# Altium PCB Board_routed.PcbDoc (part 3 of 4)
Units mm, origin at the board's own origin, x right, y up, seen from the top; angles counter-clockwise.
Board outline 115.4 x 92.5 mm, 2 copper layers (Top Layer, Bottom Layer); 95 components, 82 nets, 440 pads, 192 vias.
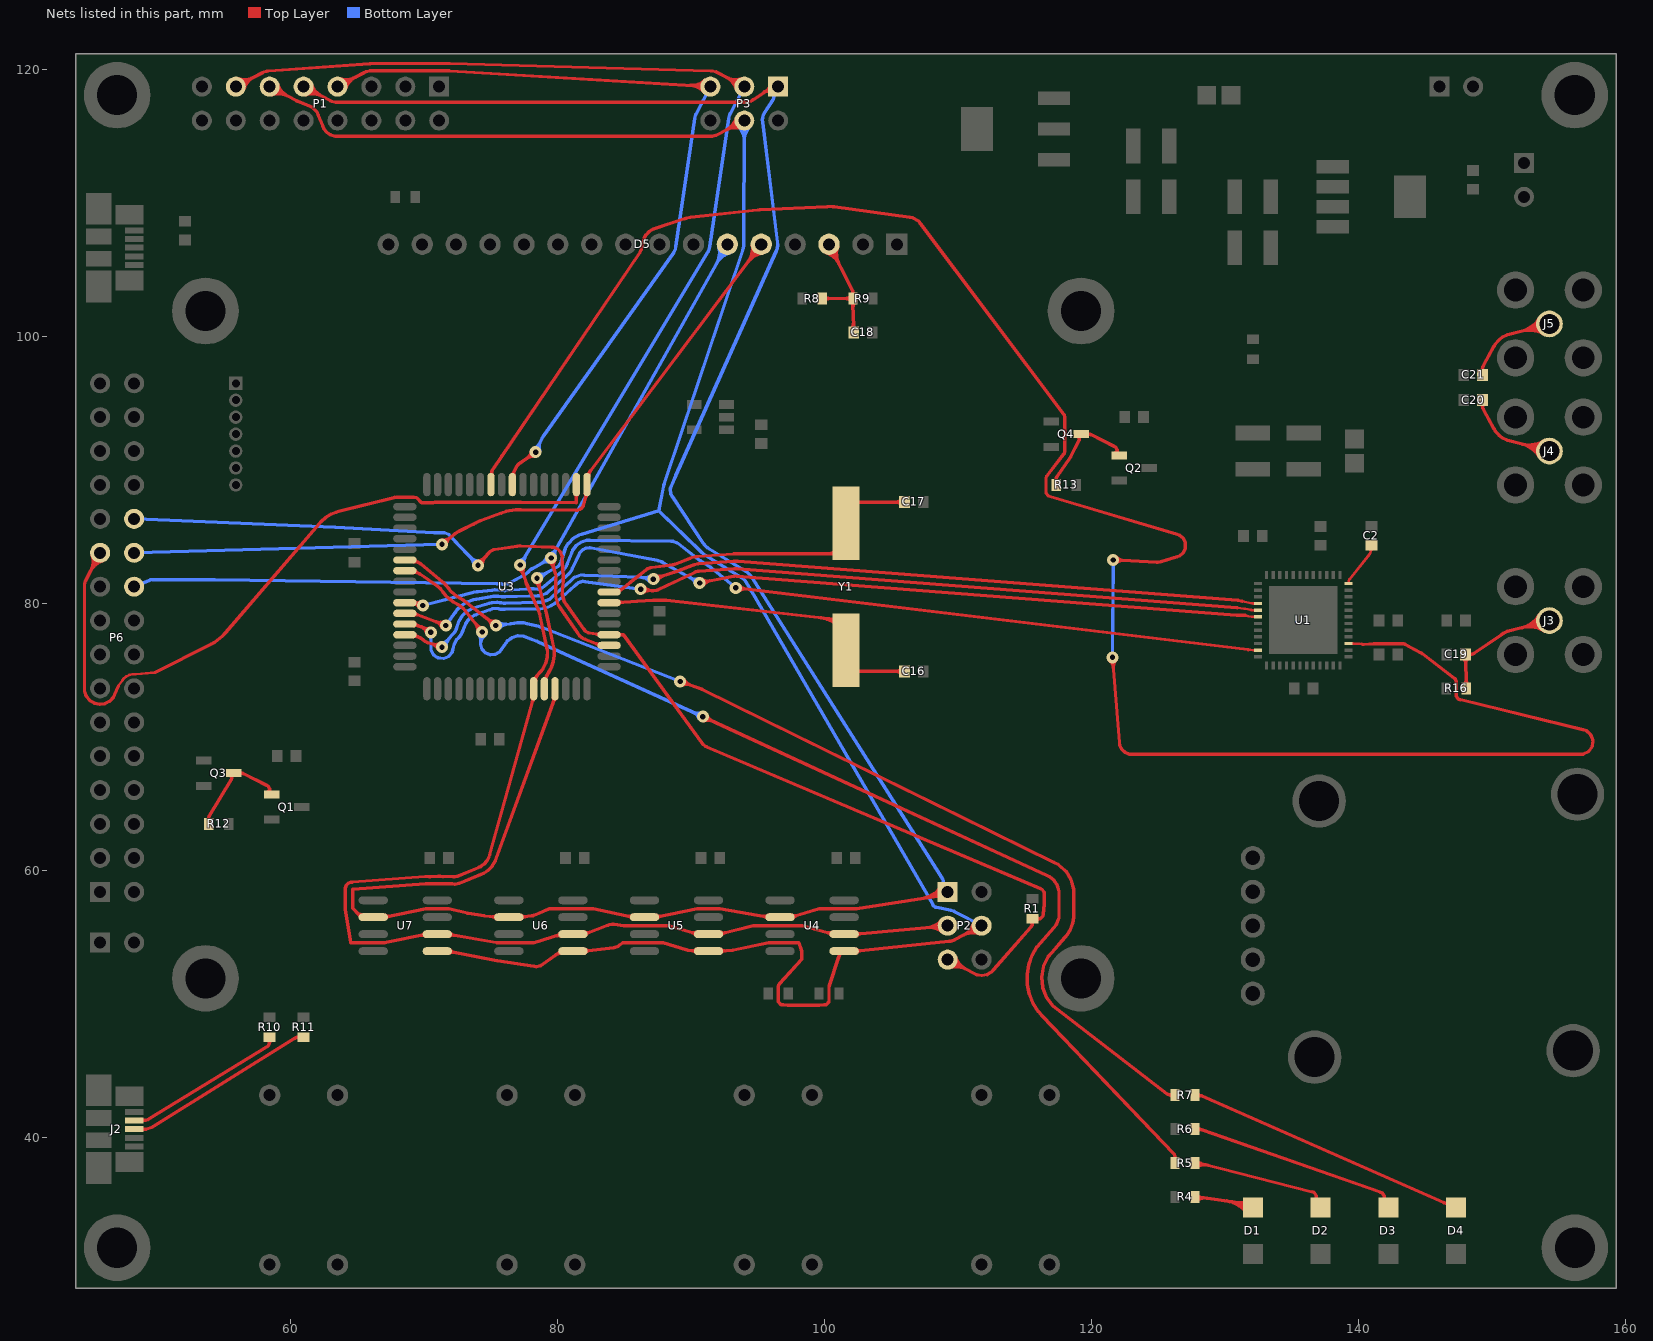
[diagram p3: the nets of this part, all layers, seen from the top]

## Via types
v1: diameter 0.9, hole 0.4, Top Layer to Bottom Layer, 183 vias
v2: diameter 0.8, hole 0.4, Top Layer to Bottom Layer, tented top, 9 vias

## Nets (pads, with @x,y where several pads share a name; then routed paths per layer and width w, separated by ;. In a path a pad name is that pad's centre, name@x,y a point inside that pad or via, vN(x,y) a via of type N, cw(c..) or ccw(c..) an arc to the next point about the centre after c; other vN are vias at no path point) (continued)
LED2: R5.2 U3.55 | length 88.7
  Top Layer w0.254: U3.55@68.55,82.48 69.023,82.48 69.15,82.48 69.184,82.48 69.25,82.464 69.279,82.448 69.611,82.271 69.637,82.257 69.688,82.226 69.712,82.209 70.93,81.359 71.037,81.284 71.229,81.103 71.312,80.999 71.446,80.83 71.655,80.567 72.173,80.133 72.469,79.975 72.476,79.971 72.636,79.885 72.915,79.654 73.028,79.513 v1(74.346,77.881) ; U3.55@69.193,82.338 cw(c69.329,81.891) 69.549,82.304 ; U3.55@69.292,82.523 ccw(c69.528,82.595) 69.412,82.377 ; v1@74.025,77.916 ccw(c73.249,77.998) 73.856,78.488 ccw(c74.463,78.978) v1@74.38,78.203 ; v1(90.88,71.54) 116.663,59.644 116.862,59.552 117.194,59.263 117.431,58.893 117.555,58.471 117.555,58.25 117.555,56.75 117.555,56.471 117.36,55.951 117.177,55.741 116.17,54.587 115.924,54.305 115.544,53.66 115.289,52.956 115.168,52.217 115.184,51.476 115.337,50.743 115.622,50.051 116.03,49.423 116.288,49.151 126.153,38.791 126.2,38.743 126.25,38.617 ; v1@90.991,71.237 cw(c91.261,70.505) 91.588,71.213 cw(c91.914,71.921) v1@91.183,71.652 ; R5.2@126.126,38.385 ccw(c125.971,38.617) 126.25,38.617 ; R5.2@126.25,38.1 126.25,38.423 126.25,38.55 126.25,38.617 ; R5.2@126.374,38.385 cw(c126.529,38.617) 126.25,38.617
  Bottom Layer w0.254: v1@74.095,77.677 cw(c73.571,77.25) 74.241,77.153 ; v1(74.346,77.881) 74.241,77.153 ; v1@74.528,77.615 ccw(c74.91,77.056) 74.241,77.153 ; v1@90.577,71.426 ccw(c89.847,71.152) 90.17,71.862 ccw(c90.492,72.572) v1@90.766,71.842 ; v1(90.88,71.54) 78.511,77.158 78.455,77.181 77.653,77.498 77.449,77.578 77.011,77.597 76.588,77.472 76.231,77.217 76.104,77.038 75.754,76.547 75.644,76.392 75.314,76.208 74.935,76.184 74.584,76.325 74.326,76.603 74.214,76.966 74.241,77.153
LED3: R7.2 U3.54 | length 82.8
  Top Layer w0.254: U3.54@68.55,83.28 69.023,83.28 69.15,83.28 69.184,83.28 69.25,83.264 69.279,83.248 69.611,83.071 69.654,83.048 69.735,82.994 69.774,82.962 71.36,81.656 71.456,81.577 71.632,81.398 71.709,81.299 71.827,81.149 72.006,80.921 72.453,80.546 72.708,80.41 72.794,80.364 72.96,80.256 73.039,80.194 v1(75.368,78.376) ; U3.54@69.193,83.138 cw(c69.329,82.691) 69.549,83.104 ; U3.54@69.292,83.323 ccw(c69.528,83.395) 69.412,83.177 ; v1@75.047,78.337 ccw(c74.273,78.242) 74.753,78.856 ccw(c75.233,79.471) v1@75.328,78.697 ; v1(89.177,74.182) 90.735,73.626 90.759,73.618 90.805,73.598 90.827,73.587 117.186,60.622 117.52,60.457 118.067,59.962 118.46,59.331 118.663,58.621 118.663,58.25 118.663,56.75 118.663,56.514 118.578,56.045 118.411,55.599 118.167,55.19 118.011,55.012 117.005,53.858 116.741,53.556 116.396,52.833 116.258,52.043 116.337,51.245 116.626,50.502 117.106,49.86 117.425,49.615 125.64,43.292 125.696,43.249 125.829,43.203 ; v1@89.316,73.89 cw(c89.65,73.185) 89.912,73.92 cw(c90.174,74.654) v1@89.469,74.32 ; R7.2@126.056,43.071 ccw(c125.83,42.944) 125.83,43.203 ; R7.2@126.077,43.321 cw(c125.83,43.522) 125.83,43.203 ; R7.2@126.25,43.18 126.027,43.203 125.9,43.203 125.829,43.203
  Bottom Layer w0.254: v1(75.368,78.376) 76.411,78.487 76.49,78.495 76.653,78.519 76.734,78.535 ; v1@75.571,78.628 ccw(c76.062,79.234) 76.143,78.458 ccw(c76.225,77.683) v1@75.619,78.173 ; 76.734,78.535 76.979,78.582 77.475,78.571 77.713,78.512 78.561,78.307 78.636,78.289 78.784,78.242 78.855,78.214 v1(89.177,74.182)
LMKCLK: U1.4 U3.61 | length 72.2
  Top Layer w0.2: 131.29,80.2 131.961,80.043 132.01,80.032 132.11,80.02 132.16,80.02 132.26,80.02 U1.4@132.46,80.02
  Top Layer w0.254: U3.61@68.55,77.68 69.023,77.68 69.15,77.68 69.182,77.68 69.243,77.666 69.272,77.652 69.689,77.446 69.763,77.409 69.9,77.316 69.962,77.261 70.026,77.204 70.173,77.119 70.253,77.094 v1(71.335,76.749) ; U3.61@69.197,77.54 cw(c69.343,77.109) 69.545,77.517 ; U3.61@69.29,77.727 ccw(c69.536,77.811) 69.421,77.578 ; v1@71.048,76.601 ccw(c70.355,76.243) 70.592,76.986 ccw(c70.829,77.729) v1@71.186,77.036 ; v1(87.17,81.85) 88.959,82.441 89.031,82.467 90.119,82.893 90.219,82.932 90.429,82.979 90.537,82.987 93.197,83.18 93.27,83.185 93.419,83.185 93.495,83.179 130.963,80.252 130.976,80.251 131,80.248 131.011,80.246 131.29,80.2 ; v1@87.315,82.139 ccw(c87.666,82.835) 87.91,82.095 ccw(c88.155,81.354) v1@87.459,81.705
  Bottom Layer w0.254: v1@71.303,77.071 ccw(c71.225,77.847) 71.829,77.353 ccw(c72.432,76.859) v1@71.656,76.781 ; v1(71.335,76.749) 72.07,77.648 72.099,77.683 72.161,77.752 72.195,77.786 72.199,77.789 72.267,77.857 72.368,78.019 72.398,78.109 72.53,78.497 72.603,78.715 72.853,79.107 73.188,79.427 73.587,79.658 73.81,79.723 74.885,80.035 75.071,80.09 75.458,80.113 75.649,80.081 75.656,80.08 75.759,80.063 75.961,80.049 76.064,80.051 78.49,80.106 78.807,80.113 79.401,80.343 79.642,80.553 80.986,81.726 81.054,81.787 81.064,81.797 81.254,81.977 81.743,82.16 82.003,82.149 86.246,81.976 86.267,81.975 86.312,81.971 86.333,81.968 v1(87.17,81.85) ; v1@86.912,81.656 ccw(c86.289,81.187) 86.398,81.959 ccw(c86.507,82.731) v1@86.976,82.108
LMKDATA: U1.5 U3.60 | length 73.9
  Top Layer w0.2: 130.92,79.7 131.452,79.631 131.525,79.619 131.894,79.546 131.96,79.533 132.094,79.52 132.16,79.52 132.26,79.52 U1.5@132.46,79.52
  Top Layer w0.254: U3.60@68.55,78.48 69.023,78.48 69.15,78.48 69.174,78.48 69.221,78.472 69.243,78.464 69.751,78.281 69.846,78.247 70.028,78.158 ; U3.60@69.213,78.346 cw(c69.389,77.973) 69.528,78.361 ; U3.60@69.284,78.543 ccw(c69.557,78.672) 69.455,78.388 ; 69.803,78.269 cw(c69.489,77.634) v1@70.181,77.787 ; 69.962,78.19 ccw(c70.211,78.696) v1@70.392,78.162 ; v1@70.173,77.865 ccw(c69.834,77.875) 69.984,78.18 ccw(c70.207,78.633) v1@70.384,78.159 ; v1@70.174,77.873 ccw(c69.855,77.889) 70.027,78.158 ; v1@70.348,78.143 cw(c70.2,78.428) 70.027,78.158 ; v1(70.496,77.856) 70.114,78.103 ; v1(86.21,81.1) 87.047,80.982 87.175,80.964 87.43,81.002 87.547,81.058 90.263,82.352 90.337,82.387 90.496,82.429 90.577,82.435 93.237,82.627 93.289,82.631 93.397,82.631 93.451,82.627 130.92,79.7 ; v1@86.404,80.842 cw(c86.873,80.219) 86.982,80.991 cw(c87.091,81.763) v1@86.468,81.294 ; 70.028,78.158 70.114,78.103 ; 70.114,78.103 ccw(c70.2,78.236) 70.298,78.111 cw(c70.2,78.236) 70.114,78.103 ; 70.114,78.103 cw(c70.028,77.969) 70.182,77.932 ccw(c70.028,77.969) 70.114,78.103
  Bottom Layer w0.254: v1(70.496,77.856) 70.506,76.742 70.507,76.537 70.703,76.175 71.045,75.946 71.453,75.903 71.835,76.057 72.101,76.372 72.145,76.572 72.189,76.774 72.23,76.961 72.413,77.296 72.549,77.43 72.552,77.434 72.646,77.528 72.794,77.75 72.844,77.872 73.063,78.406 73.118,78.541 73.284,78.784 73.497,78.986 73.747,79.14 73.884,79.188 74.949,79.564 75.099,79.617 75.416,79.645 75.573,79.619 75.58,79.618 75.695,79.599 75.927,79.581 76.042,79.583 78.473,79.608 78.68,79.611 79.089,79.689 79.474,79.838 79.827,80.052 79.984,80.191 81.32,81.377 81.386,81.437 81.396,81.447 81.529,81.573 81.877,81.685 82.058,81.66 v1(86.21,81.1)
LMKGOE: U1.11 U3.58 | length 71
  Top Layer w0.2: 131.73,76.57 132.114,76.523 132.125,76.521 132.148,76.52 132.16,76.52 132.26,76.52 U1.11@132.46,76.52
  Top Layer w0.254: U3.58@68.55,80.08 69.023,80.08 69.15,80.08 69.17,80.08 69.21,80.074 U3.58@69.229,80.068 ; U3.58@69.22,79.95 cw(c69.408,79.6) v1@69.522,79.98 ; U3.58@69.28,80.15 ccw(c69.56,80.301) v1@69.469,79.996 ; U3.58@69.353,79.985 ccw(c69.366,80.426) v1@69.669,80.105 ; U3.58@69.377,80.053 ccw(c69.493,80.24) v1@69.654,80.09 ; U3.58@69.401,80.039 cw(c69.195,79.706) v1@69.576,79.796 ; v1@69.593,79.743 ccw(c69.064,79.517) U3.58@69.229,80.068 ; v1@69.712,80.139 cw(c69.395,80.62) U3.58@69.229,80.068 ; v1(69.89,79.87) U3.58@69.229,80.068 ; v1(93.34,81.2) 131.73,76.57 ; v1@93.539,80.946 cw(c94.021,80.332) 94.114,81.107 cw(c94.208,81.881) v1@93.594,81.399
  Bottom Layer w0.254: v1(69.89,79.87) 71.564,80.309 71.565,80.31 73.579,80.833 73.69,80.862 73.915,80.903 74.026,80.914 75.089,81.026 75.269,81.045 75.627,81.034 75.802,81.005 75.809,81.004 75.883,80.992 76.03,80.985 76.105,80.991 77.658,81.103 77.834,81.116 78.195,81.117 78.37,81.105 78.392,81.103 78.551,81.092 78.856,81.191 78.978,81.295 80.335,82.439 80.456,82.541 80.643,82.8 80.701,82.948 81.059,83.847 81.14,84.049 81.412,84.386 81.772,84.627 82.189,84.751 82.405,84.748 88.52,84.677 88.664,84.675 88.936,84.58 89.049,84.491 90.529,83.338 90.577,83.3 90.679,83.228 90.733,83.194 91.405,82.77 91.442,82.746 91.513,82.695 91.546,82.668 v1(93.34,81.2)
LMKLE: U1.6 U3.59 | length 71.5
  Top Layer w0.2: 131.52,79.13 131.612,79.102 131.747,79.061 132.022,79.02 132.16,79.02 132.26,79.02 U1.6@132.46,79.02
  Top Layer w0.254: U3.59@68.55,79.28 69.023,79.28 69.15,79.28 69.175,79.28 69.223,79.271 69.247,79.263 v1(71.618,78.374) ; U3.59@69.211,79.145 cw(c69.384,78.766) 69.53,79.156 ; U3.59@69.285,79.341 ccw(c69.556,79.464) 69.451,79.186 ; v1@71.324,78.24 ccw(c70.614,77.917) 70.888,78.647 ccw(c71.161,79.378) v1@71.484,78.668 ; v1(90.64,81.56) 93.17,82.06 93.229,82.072 93.349,82.079 93.408,82.074 130.877,79.148 130.908,79.146 131.32,79.137 131.328,79.137 131.52,79.13 ; v1@90.82,81.828 ccw(c91.254,82.476) 91.405,81.711 ccw(c91.556,80.946) v1@90.908,81.38
  Bottom Layer w0.254: v1(71.618,78.374) 72.31,79.34 72.45,79.536 72.804,79.87 73.216,80.129 73.669,80.305 73.907,80.347 74.983,80.539 75.167,80.571 75.54,80.574 75.725,80.543 75.733,80.542 75.819,80.528 75.991,80.517 76.076,80.52 77.86,80.584 77.881,80.585 78.49,80.604 78.715,80.611 79.135,80.774 79.307,80.921 80.657,82.08 80.799,82.201 81.023,82.494 81.102,82.66 81.597,83.696 81.66,83.826 81.863,84.034 82.121,84.165 82.409,84.206 82.552,84.179 87.436,83.256 87.547,83.235 87.764,83.157 87.865,83.101 v1(90.64,81.56) ; v1@90.329,81.471 ccw(c89.58,81.257) 89.958,81.939 ccw(c90.337,82.62) v1@90.551,81.871
LMKSYNC: U1.27 U3.42 | length 159.3
  Top Layer w0.2: U1.27@139.26,77.02 139.46,77.02 139.56,77.02 139.562,77.02 140.025,77.013 140.098,77.012 140.239,76.981 140.306,76.952 140.31,76.95
  Top Layer w0.254: U3.42@75,88.93 75,89.403 75,89.53 75,89.689 75.093,89.995 75.182,90.128 75.815,91.073 75.821,91.082 86.105,106.245 86.163,106.331 86.249,106.518 86.275,106.617 86.445,107.251 86.484,107.398 86.633,107.665 86.841,107.886 87.098,108.05 87.244,108.099 89.532,108.858 89.632,108.891 89.843,108.937 89.949,108.949 94.968,109.5 95.125,109.512 100.193,109.758 100.325,109.764 100.586,109.752 100.718,109.734 106.378,108.949 106.621,108.916 107.044,108.667 107.191,108.471 117.901,94.216 117.943,94.161 117.987,94.029 117.987,93.96 117.987,91.46 117.987,91.389 117.941,91.255 117.898,91.199 116.672,89.611 116.629,89.555 116.583,89.421 116.583,89.35 116.583,88.45 116.583,88.309 116.752,88.082 116.888,88.041 126.4,85.202 126.582,85.147 126.868,84.898 127.026,84.554 127.027,84.173 126.871,83.827 126.586,83.577 126.404,83.522 125.174,83.149 125.1,83.126 124.95,83.108 124.873,83.112 v1(121.612,83.285) ; 75.073,89.929 ccw(c75.423,89.822) U3.42@75.122,89.614 ; v1@121.359,75.745 cw(c120.854,75.15) 121.632,75.214 cw(c122.409,75.277) v1@121.814,75.782 ; v1(121.568,75.991) 122.092,69.581 122.106,69.406 122.259,69.093 122.515,68.857 122.841,68.729 123.016,68.729 156.616,68.729 156.843,68.729 157.248,68.941 157.508,69.317 157.563,69.771 157.401,70.198 157.059,70.501 156.837,70.556 147.625,72.822 147.49,72.855 147.32,73.072 147.32,73.21 147.32,74.11 147.32,74.203 147.237,74.371 147.164,74.427 144.788,76.251 144.76,76.272 144.7,76.31 144.67,76.327 143.504,76.955 143.466,76.976 143.383,76.997 143.34,76.997 141.14,76.997 141.118,76.996 140.385,76.95 140.366,76.948 140.328,76.949 140.31,76.95 ; v1@121.828,83.045 cw(c122.35,82.465) 122.391,83.244 cw(c122.432,84.023) v1@121.853,83.501
  Bottom Layer w0.254: v1(121.568,75.991) v1(121.612,83.285)
MISO: P1.9 P2.1 P3.1 U3.13 U4.2 U5.2 U6.2 U7.2 | length 200.4
  Top Layer w0.234: 79.371,57.148 82.669,57.154
  Top Layer w0.254: P1.9@60.96,118.745 62.955,117.702 63.081,117.636 63.358,117.568 63.5,117.568 93.98,117.568 94.152,117.568 94.479,117.665 94.621,117.758 95.537,118.353 95.589,118.387 95.708,118.422 95.77,118.422 95.897,118.422 P3.1@96.52,118.745 ; P1.9@61.07,118.393 cw(c61.337,117.543) 61.749,118.332 cw(c62.162,119.122) P1.9@61.312,118.855 ; P1.9@61.146,118.15 cw(c61.596,116.715) 62.293,118.048 cw(c62.99,119.381) P1.9@61.555,118.931 ; 64.866,56.942 ccw(c65.435,57.448) U7.2@65.39,56.688 ; U7.2@67.076,56.659 ccw(c67.318,57.024) 67.405,56.595 ; U7.2@67.124,56.419 cw(c67.455,56.2) 67.377,56.589 ; 70.208,57.15 71.752,57.15 ; 70.208,57.151 70.201,57.151 70.187,57.15 70.18,57.15 70.163,57.15 70.13,57.147 70.113,57.143 67.04,56.521 67.025,56.518 66.995,56.515 66.98,56.515 66.853,56.515 U7.2@66.18,56.515 65.507,56.515 65.38,56.515 65.316,56.515 65.199,56.567 65.156,56.616 64.641,57.195 64.643,58.248 64.641,58.598 70.106,59.029 70.137,59.031 70.198,59.032 70.229,59.03 70.343,59.024 70.374,59.023 70.433,59.022 70.462,59.023 70.703,59.03 70.738,59.03 70.807,59.03 70.861,59.03 71.094,59.037 71.158,59.036 71.268,59.032 71.299,59.03 71.312,59.029 71.343,59.027 71.407,59.025 71.439,59.025 71.768,59.03 71.787,59.03 71.825,59.029 71.843,59.028 72.12,59.009 72.294,58.998 72.634,59.054 72.795,59.12 74.275,59.733 74.465,59.811 74.807,60.045 75.091,60.341 75.31,60.692 75.38,60.886 79.783,72.936 79.792,72.958 79.8,73.006 79.8,73.03 79.8,73.157 U3.13@79.8,73.63 ; 71.752,57.151 71.758,57.151 71.77,57.15 71.776,57.15 71.784,57.15 71.802,57.15 71.838,57.145 71.855,57.141 73.223,56.825 73.279,56.814 74.505,56.615 74.54,56.61 75.511,56.516 75.519,56.516 75.533,56.515 75.54,56.515 75.667,56.515 U6.2@76.34,56.515 77.013,56.515 77.14,56.515 77.148,56.515 77.165,56.516 77.173,56.517 78.059,56.615 78.099,56.619 78.177,56.64 78.215,56.656 79.371,57.148 ; 75.121,56.554 ccw(c75.161,56.975) U6.2@75.43,56.649 ; 75.127,56.553 cw(c75.088,56.142) U6.2@75.406,56.405 ; U6.2@77.248,56.65 ccw(c77.513,56.981) 77.56,56.56 ; U6.2@77.275,56.407 cw(c77.596,56.15) 77.551,56.559 ; U3.13@79.666,72.968 cw(c79.29,72.793) 79.679,72.651 ; 79.707,72.727 cw(c79.989,72.624) U3.13@79.862,72.896 ; 82.669,57.154 85.637,56.522 85.653,56.518 85.684,56.515 85.7,56.515 85.827,56.515 U5.2@86.5,56.515 87.173,56.515 87.3,56.515 87.315,56.515 87.345,56.518 87.36,56.521 90.433,57.143 90.45,57.147 90.483,57.15 90.5,57.15 90.507,57.15 90.521,57.151 ; 85.275,56.599 ccw(c85.366,57.029) U5.2@85.606,56.66 ; 85.306,56.592 cw(c85.223,56.206) U5.2@85.555,56.421 ; U5.2@87.396,56.659 ccw(c87.638,57.024) 87.725,56.595 ; U5.2@87.444,56.419 cw(c87.775,56.2) 87.697,56.589 ; 90.528,57.151 90.521,57.151 ; 95.437,56.583 ccw(c95.51,57.009) U4.2@95.76,56.656 ; 95.458,56.58 cw(c95.39,56.182) U4.2@95.719,56.415 ; P3.1@95.793,118.422 cw(c95.794,118.017) P3.1@96.08,118.304 ; P3.1@95.898,118.777 cw(c95.47,118.798) 95.592,118.387 cw(c95.749,117.857) P3.1@96.111,118.275 ; P3.1@95.905,118.844 cw(c95.298,118.941) 95.473,118.352 cw(c95.698,117.592) P3.1@96.158,118.238 ; U4.2@97.541,56.668 ccw(c97.757,57.077) 97.894,56.635 ; U4.2@97.613,56.434 cw(c97.942,56.26) 97.832,56.616 ; 107.293,57.918 ccw(c106.955,60.071) P2.1@108.717,58.787 ; 107.796,57.997 ccw(c107.625,59.091) P2.1@108.646,58.661 ; 107.899,58.013 ccw(c107.656,59.56) P2.1@108.922,58.637 ; 108.246,58.067 ccw(c108.118,58.883) P2.1@108.88,58.563 ; P2.1@108.496,58.097 cw(c108.496,57.696) P2.1@108.779,57.979 ; P2.1@108.505,58.108 ccw(c108.357,59.049) P2.1@109.127,58.488 ; P2.1@109.22,58.42 108.597,58.097 108.47,58.097 108.454,58.097 108.42,58.094 108.404,58.092 102.399,57.15 99.578,57.154 97.548,56.528 97.527,56.522 97.483,56.515 97.46,56.515 97.333,56.515 U4.2@96.66,56.515 95.987,56.515 95.86,56.515 95.847,56.515 95.822,56.517 95.809,56.519 92.157,57.145 92.143,57.148 92.114,57.15 92.1,57.15 92.093,57.15 92.079,57.151 92.072,57.151 90.521,57.149 ; 108.236,58.066 cw(c108.365,57.247) 108.853,57.917 ccw(c108.365,57.247) 108.236,58.066 ; 108.331,58.087 ccw(c108.24,59.259) 109.133,58.495 cw(c108.24,59.259) 108.331,58.087 ; 108.373,58.091 cw(c108.42,57.485) 108.815,57.947 ccw(c108.42,57.485) 108.373,58.091
  Bottom Layer w0.254: P3.1@96.08,118.304 cw(c95.8,118.022) P3.1@96.197,118.023 ; P3.1@96.52,118.745 96.197,118.122 96.197,117.995 96.197,117.933 96.162,117.815 96.128,117.762 95.533,116.846 95.42,116.672 95.326,116.266 95.352,116.06 96.468,107.085 96.488,106.919 96.439,106.587 96.37,106.433 88.849,89.606 88.845,89.596 88.524,88.845 88.437,88.641 88.477,88.2 88.599,88.015 90.897,84.549 90.983,84.42 91.205,84.205 91.337,84.123 94.093,82.417 94.232,82.331 94.462,82.103 94.549,81.965 108.831,59.398 108.863,59.347 108.897,59.231 108.897,59.17 108.897,59.043 P2.1@109.22,58.42 ; P2.1@108.779,58.861 ccw(c108.496,59.144) P2.1@108.897,59.144
MOSI: P1.11 P2.4 P3.4 U3.12 U4.5 U5.5 U6.5 U7.5 | length 202.4
  Top Layer w0.254: P1.11@58.42,118.745 60.415,117.702 60.44,117.689 60.492,117.664 60.518,117.654 61.402,117.296 61.623,117.206 61.961,116.869 62.051,116.647 62.409,115.763 62.475,115.6 62.697,115.327 62.989,115.13 63.323,115.028 63.5,115.028 91.44,115.028 91.582,115.028 91.859,115.096 91.985,115.162 P3.4@93.98,116.205 ; P1.11@58.53,118.393 cw(c58.797,117.543) 59.209,118.332 cw(c59.622,119.122) P1.11@58.772,118.855 ; P1.11@58.606,118.15 cw(c59.056,116.715) 59.753,118.048 cw(c60.45,119.381) P1.11@59.015,118.931 ; U7.5@70.98,53.975 71.653,53.975 71.78,53.975 71.794,53.975 71.824,53.972 71.838,53.969 75.457,53.256 75.476,53.253 78.231,52.837 78.401,52.811 78.734,52.892 78.873,52.992 80.165,53.919 80.204,53.946 80.293,53.975 80.34,53.975 80.467,53.975 U6.5@81.14,53.975 81.813,53.975 81.94,53.975 81.949,53.975 81.966,53.976 81.975,53.977 84.193,54.238 84.311,54.252 84.531,54.341 84.624,54.413 84.875,54.605 85.839,54.61 87.896,54.605 89.637,54.075 89.662,54.067 89.714,54.057 89.74,54.054 90.468,53.977 90.476,53.976 90.492,53.975 90.5,53.975 90.627,53.975 U5.5@91.3,53.975 91.973,53.975 92.1,53.975 92.106,53.975 92.117,53.975 92.123,53.976 93.119,54.052 93.136,54.054 93.172,54.059 93.189,54.062 95.792,54.603 95.809,54.606 95.843,54.61 95.86,54.61 95.999,54.61 98.077,54.613 98.283,53.971 98.283,53.364 96.623,51.517 96.573,51.462 96.52,51.324 96.52,51.25 96.52,50.35 96.52,50.193 96.733,49.963 96.889,49.951 97.237,49.924 97.245,49.924 97.262,49.923 97.27,49.923 99.58,49.923 99.588,49.923 99.605,49.924 99.613,49.924 99.961,49.951 100.117,49.963 100.33,50.193 100.33,50.35 100.33,50.777 100.33,50.781 100.33,50.796 100.33,50.804 100.33,50.819 100.33,50.823 100.33,51.25 100.33,51.282 100.34,51.345 100.35,51.375 101.066,53.541 101.076,53.574 101.087,53.641 101.087,53.675 101.087,53.802 U4.5@101.46,53.975 102.133,53.975 102.26,53.975 102.268,53.975 102.283,53.976 102.291,53.977 109.342,54.709 109.452,54.721 109.667,54.786 109.765,54.837 P2.4@111.76,55.88 ; U7.5@71.876,53.831 cw(c72.12,53.469) 72.204,53.897 ; U7.5@71.924,54.071 ccw(c72.255,54.293) 72.178,53.902 ; v1@78.283,81.645 cw(c77.882,80.975) 78.638,81.165 cw(c79.395,81.355) v1@78.726,81.756 ; v1(78.448,81.922) 78.907,80.097 78.928,80.012 78.982,79.839 79.015,79.753 79.068,79.612 79.152,79.324 79.183,79.178 79.681,76.805 79.729,76.578 79.741,76.116 79.67,75.655 79.518,75.218 79.403,75.015 79.036,74.365 79.018,74.334 79,74.266 79,74.23 79,74.103 U3.12@79,73.63 ; U3.12@79.143,74.27 cw(c79.604,74.398) 79.187,74.633 ; 79.858,53.698 cw(c80.213,53.203) U6.5@80.312,53.804 ; U6.5@82.047,54.111 ccw(c82.31,54.444) 82.36,54.022 ; U6.5@82.076,53.868 cw(c82.398,53.613) 82.35,54.021 ; 90.081,54.018 ccw(c90.125,54.439) U5.5@90.391,54.11 ; 90.088,54.017 cw(c90.045,53.607) U5.5@90.365,53.866 ; U5.5@92.213,54.106 ccw(c92.486,54.426) 92.519,54.006 ; U5.5@92.231,53.862 cw(c92.546,53.592) 92.514,54.006 ; P3.4@93.385,116.391 cw(c91.95,116.841) 92.647,115.508 cw(c93.344,114.175) P3.4@93.794,115.61 ; P3.4@93.628,116.315 cw(c92.778,116.582) 93.191,115.792 cw(c93.603,115.003) P3.4@93.87,115.853 ; U4.5@102.369,54.109 ccw(c102.636,54.438) 102.679,54.017 ; U4.5@102.394,53.866 cw(c102.714,53.606) 102.672,54.016 ; P2.4@111.165,56.066 cw(c109.73,56.516) 110.427,55.183 cw(c111.124,53.85) P2.4@111.574,55.285 ; P2.4@111.408,55.99 cw(c110.558,56.257) 110.971,55.467 cw(c111.383,54.678) P2.4@111.65,55.528 ; 101.059,53.465 cw(c101.93,53.326) 101.412,54.041 ccw(c101.93,53.326) 101.059,53.465
  Bottom Layer w0.254: v1(78.448,81.922) 79.893,82.719 80.031,82.795 80.229,83.039 80.275,83.19 80.49,83.895 80.561,84.129 80.814,84.55 81.159,84.895 81.58,85.147 81.813,85.217 87.57,86.96 ; v1@78.538,82.232 ccw(c78.755,82.981) 79.131,82.298 ccw(c79.508,81.616) v1@78.759,81.832 ; P3.4@93.537,115.767 cw(c92.469,114.708) 93.973,114.701 cw(c95.477,114.694) P3.4@94.418,115.762 ; P3.4@93.718,115.945 cw(c93.085,115.318) 93.976,115.314 cw(c94.867,115.31) P3.4@94.24,115.943 ; P3.4@93.98,116.205 93.937,106.928 93.936,106.83 93.905,106.637 93.873,106.544 87.973,88.955 87.958,88.91 87.935,88.821 87.926,88.775 87.57,86.96 ; P2.4@111.76,55.88 109.765,56.923 109.693,56.961 109.535,57.017 109.455,57.033 108.385,57.252 108.295,57.27 108.146,57.377 108.1,57.456 94.514,80.943 94.51,80.95 94.093,81.649 94.039,81.74 93.891,81.89 93.802,81.946 91.045,83.652 90.954,83.708 90.785,83.841 90.708,83.915 87.57,86.96
ND_CS/D_EN: D5.6 P6.20 U3.19 | length 76
  Top Layer w0.254: v1@79.342,83.145 cw(c78.95,82.471) 79.704,82.671 cw(c80.458,82.87) v1@79.783,83.262 ; v1(79.504,83.424) 79.72,82.611 79.734,82.555 79.767,82.449 79.786,82.395 79.83,82.272 79.871,82.015 79.867,81.883 79.841,80.919 79.831,80.585 80.022,79.94 80.213,79.664 81.513,77.778 81.616,77.629 81.898,77.403 82.067,77.335 83.147,76.9 83.172,76.89 83.223,76.88 83.25,76.88 83.377,76.88 U3.19@83.85,76.88 ; 82.867,77.013 ccw(c83.025,77.407) U3.19@83.192,77.016 ; 82.956,76.977 cw(c82.848,76.709) U3.19@83.114,76.822
  Bottom Layer w0.254: P6.20@48.26,81.28 49.427,81.766 49.484,81.79 49.605,81.814 49.668,81.814 52.081,81.814 54.303,81.814 54.312,81.814 75.413,81.509 75.53,81.507 75.765,81.486 75.878,81.467 75.885,81.466 76.017,81.445 76.279,81.49 76.396,81.554 77.572,82.202 77.643,82.241 77.767,82.347 77.817,82.412 77.867,82.475 77.989,82.58 78.06,82.62 v1(79.504,83.424) D5.6@92.71,106.934 ; v1@79.193,83.513 cw(c78.443,83.726) 78.823,83.045 cw(c79.202,82.364) v1@79.416,83.114 ; v1@79.417,83.735 ccw(c79.206,84.486) 79.886,84.104 ccw(c80.566,83.722) v1@79.815,83.512 ; D5.6@92.062,106.752 cw(c90.498,106.313) 91.914,105.517 cw(c93.331,104.722) D5.6@92.892,106.286 ; D5.6@92.307,106.821 cw(c91.333,106.547) 92.215,106.052 cw(c93.097,105.557) D5.6@92.823,106.531
NetC2_2: C2.2 U1.36 | length 4.1
  Top Layer w0.2: U1.36@139.26,81.52 139.26,81.545 139.26,81.645 139.26,81.696 139.293,81.791 139.325,81.831 140.834,83.742 140.876,83.795 140.92,83.922 ; 139.269,81.722 ccw(c139.5,81.642) U1.36@139.282,81.531 ; C2.2@140.795,84.117 cw(c140.706,83.922) 140.92,83.922 ; C2.2@140.97,84.39 140.92,84.09 140.92,83.99 140.92,83.922 ; C2.2@141.045,84.117 ccw(c141.134,83.922) 140.92,83.922
NetC16_2: C16.2 U3.23 Y1.1 | length 36.5
  Top Layer w0.254: U3.23@83.85,80.08 84.323,80.08 84.45,80.08 84.455,80.08 84.465,80.08 84.471,80.081 85.955,80.193 85.968,80.194 87.154,80.266 87.18,80.267 88.08,80.267 88.092,80.267 88.116,80.266 88.128,80.264 100.552,78.856 100.564,78.854 100.588,78.853 100.6,78.853 100.727,78.853 Y1.1@101.6,76.53 102.473,74.953 102.6,74.953 105.58,74.953 105.707,74.953 C16.2@105.98,74.93 ; U3.23@84.546,80.192 ccw(c84.781,80.465) 84.808,80.106 ; U3.23@84.562,79.984 cw(c84.831,79.752) 84.805,80.106 ; 99.687,78.954 cw(c99.413,76.538) Y1.1@101.314,78.053 ; 99.761,78.945 cw(c99.507,76.706) Y1.1@101.308,78.061 ; 100.296,78.885 cw(c100.091,77.078) Y1.1@101.513,78.211 ; 100.347,78.879 cw(c100.156,77.194) Y1.1@101.511,78.213 ; Y1.1@101.858,74.522 cw(c102.899,73.481) 102.899,74.953 ; Y1.1@102.038,75.218 ccw(c102.677,75.857) 102.677,74.953 ; 105.265,74.953 cw(c105.265,74.215) C16.2@105.787,74.737 ; 105.376,74.953 ccw(c105.376,75.534) C16.2@105.787,75.123 ; Y1.1@100.646,78.845 ccw(c100.709,79.399) 101.056,78.963 cw(c100.709,79.399) Y1.1@100.646,78.845 ; Y1.1@100.655,78.844 ccw(c100.714,79.384) 101.053,78.961 cw(c100.714,79.384) Y1.1@100.655,78.844
NetC17_2: C17.2 U3.24 Y1.2 | length 31.6
  Top Layer w0.254: U3.24@83.85,80.88 84.323,80.88 84.45,80.88 84.497,80.88 84.587,80.912 84.623,80.941 85.657,81.781 85.67,81.791 86.63,82.541 86.722,82.613 86.937,82.704 87.053,82.719 88.627,82.931 88.678,82.938 88.781,82.964 88.829,82.983 89.917,83.409 90.057,83.463 90.348,83.529 90.497,83.54 93.157,83.732 93.203,83.736 93.296,83.739 93.34,83.739 100.6,83.739 100.727,83.739 Y1.2@101.6,86.03 102.473,87.607 102.6,87.607 105.58,87.607 105.707,87.607 C17.2@105.98,87.63 ; U3.24@84.465,81.027 ccw(c84.524,81.591) 84.881,81.151 ; 100.026,83.739 ccw(c100.026,85.854) Y1.2@101.522,84.358 ; Y1.2@100.639,83.739 ccw(c100.639,85.241) Y1.2@101.701,84.179 ; Y1.2@101.858,88.038 ccw(c102.899,89.079) 102.899,87.607 ; Y1.2@102.038,87.342 cw(c102.677,86.703) 102.677,87.607 ; 105.265,87.607 ccw(c105.265,88.345) C17.2@105.787,87.823 ; 105.376,87.607 cw(c105.376,87.026) C17.2@105.787,87.437
NetC18_1: C18.1 D5.3 R8.1 R9.2 | length 17.9
  Top Layer w0.254: R8.1@99.81,102.87 100.033,102.87 100.16,102.87 101.77,102.87 101.897,102.87 R9.2@102.12,102.87 ; R8.1@99.968,102.712 cw(c100.348,102.332) 100.348,102.87 cw(c100.348,103.408) R8.1@99.968,103.028 ; D5.3@100.121,106.294 cw(c99.616,104.75) 101.065,105.485 cw(c102.514,106.22) D5.3@100.97,106.725 ; D5.3@100.2,106.536 cw(c99.885,105.574) 100.787,106.032 cw(c101.69,106.489) D5.3@100.728,106.804 ; D5.3@100.33,106.934 102.082,103.478 102.101,103.442 102.12,103.361 ; R9.2@101.962,102.712 ccw(c101.582,102.332) 101.582,102.87 ccw(c101.582,103.408) R9.2@101.962,103.028 ; R9.2@101.967,102.608 cw(c101.624,102.242) 102.125,102.258 ; C18.1@101.971,100.567 ccw(c101.46,101.048) 102.161,101.069 ; R9.2@102.006,103.162 ccw(c101.889,103.361) 102.12,103.361 ; C18.1@102.065,100.632 ccw(c101.999,100.79) 102.17,100.792 ; 102.126,102.205 cw(c102.702,102.223) R9.2@102.282,102.617 ; 102.163,101.009 ccw(c102.779,101.028) C18.1@102.357,100.579 ; C18.1@102.17,100.33 102.17,100.653 102.17,100.78 102.17,100.792 ; R9.2@102.234,103.162 cw(c102.351,103.361) 102.12,103.361 ; C18.1@102.278,100.631 cw(c102.349,100.795) 102.17,100.792 ; R9.2@102.12,102.87 102.12,102.547 102.12,102.42 102.12,102.409 102.17,100.792 ; R9.2@102.12,102.87 102.12,103.193 102.12,103.32 102.12,103.361
NetC19_1: C19.1 J3.1 R16.1 | length 17.9
  Top Layer w0.254: C19.1@147.833,75.951 cw(c147.411,75.502) 148.027,75.521 ; R16.1@147.908,73.913 ccw(c147.488,74.307) 148.064,74.325 ; R16.1@147.972,73.96 ccw(c147.895,74.118) 148.07,74.121 ; 148.029,75.461 cw(c148.73,75.482) C19.1@148.219,75.963 ; 148.065,74.272 ccw(c148.566,74.288) R16.1@148.223,73.922 ; R16.1@148.07,73.66 148.07,73.983 148.07,74.11 148.07,74.121 ; R16.1@148.171,73.959 cw(c148.256,74.124) 148.07,74.121 ; C19.1@148.248,76.35 ccw(c148.485,76.507) 148.485,76.223 ; C19.1@148.267,76.085 cw(c148.485,75.983) 148.485,76.223 ; J3.1@153.553,79.184 cw(c151.739,80.256) 152.264,78.215 cw(c152.789,76.174) J3.1@153.861,77.988 ; J3.1@153.772,79.055 cw(c152.485,79.815) 152.858,78.368 cw(c153.23,76.92) J3.1@153.99,78.207 ; J3.1@154.305,78.74 151.31,77.969 151.155,77.93 150.867,77.799 150.737,77.71 148.66,76.297 148.607,76.261 148.485,76.223 ; 148.07,74.121 148.02,75.738 148.02,75.75 148.02,75.877 C19.1@148.02,76.2 148.293,76.223 148.42,76.223 148.485,76.223
NetC20_1: C20.1 J4.1 | length 13.1
  Top Layer w0.254: C20.1@149.164,94.958 cw(c149.055,94.75) 149.29,94.75 ; C20.1@149.29,95.25 149.29,94.927 149.29,94.8 149.29,94.75 ; C20.1@149.416,94.958 ccw(c149.525,94.75) 149.29,94.75 ; J4.1@153.553,90.996 ccw(c151.739,89.924) 152.264,91.965 ccw(c152.789,94.006) J4.1@153.861,92.192 ; J4.1@153.772,91.125 ccw(c152.485,90.365) 152.858,91.812 ccw(c153.23,93.26) J4.1@153.99,91.973 ; J4.1@154.305,91.44 151.31,92.211 151.127,92.258 150.791,92.423 150.496,92.653 150.253,92.938 150.162,93.103 149.339,94.608 149.315,94.652 149.29,94.75
NetC21_1: C21.1 J5.1 | length 13.1
  Top Layer w0.254: C21.1@149.164,97.447 ccw(c149.055,97.656) 149.29,97.655 ; C21.1@149.29,97.155 149.29,97.478 149.29,97.605 149.29,97.655 ; C21.1@149.416,97.447 cw(c149.524,97.655) 149.29,97.655 ; J5.1@153.553,101.409 cw(c151.739,102.481) 152.264,100.44 cw(c152.789,98.399) J5.1@153.861,100.213 ; J5.1@153.772,101.28 cw(c152.485,102.04) 152.858,100.593 cw(c153.23,99.145) J5.1@153.99,100.432 ; J5.1@154.305,100.965 151.31,100.194 151.127,100.147 150.791,99.982 150.496,99.752 150.253,99.467 150.162,99.302 149.339,97.797 149.315,97.753 149.29,97.655
NetD1_1: D1.1 R4.1 | length 16.8
  Top Layer w0.254: R4.1@127.75,35.56 127.973,35.537 128.1,35.537 128.115,35.537 ; R4.1@127.884,35.282 cw(c128.474,34.501) 128.609,35.47 ; R4.1@127.937,35.438 cw(c128.118,35.319) 128.133,35.536 cw(c128.148,35.755) R4.1@127.95,35.658 ; R4.1@127.938,35.44 cw(c128.115,35.328) 128.115,35.537 ; R4.1@127.945,35.452 cw(c128.092,35.37) 128.103,35.538 cw(c128.115,35.708) 127.957,35.644 ccw(c128.115,35.707) 128.115,35.537 ; 130.114,35.259 cw(c129.805,33.054) D1.1@131.583,34.395 ; 130.537,35.2 cw(c130.356,33.908) D1.1@131.523,34.491 ; 130.721,35.174 cw(c130.497,33.576) D1.1@131.785,34.548 ; 131.016,35.133 cw(c130.881,34.171) D1.1@131.75,34.605 ; 131.328,35.089 cw(c131.19,34.098) D1.1@131.988,34.701 ; D1.1@131.356,35.093 ccw(c131.356,35.494) D1.1@131.639,35.211 ; D1.1@132.08,34.77 131.457,35.093 131.33,35.093 131.315,35.093 131.286,35.095 131.271,35.097 128.159,35.533 128.144,35.535 128.115,35.537 ; 131.126,35.117 ccw(c131.234,35.891) 131.705,35.267 cw(c131.234,35.891) 131.126,35.117 ; 131.169,35.103 cw(c131.088,33.903) 131.993,34.694 ccw(c131.088,33.903) 131.169,35.103 ; 131.25,35.097 ccw(c131.289,35.675) 131.67,35.239 cw(c131.289,35.675) 131.25,35.097
NetD2_1: D2.1 R5.1 | length 12.5
  Top Layer w0.254: R5.1@127.734,38.027 cw(c128,37.577) 128.13,38.083 ; R5.1@127.75,38.1 127.973,38.077 128.1,38.077 128.127,38.077 ; R5.1@127.864,37.808 cw(c128.442,36.831) 128.724,37.931 ; R5.1@127.935,37.975 cw(c128.127,37.845) 128.127,38.077 ; R5.1@127.954,38.19 ccw(c128.127,38.265) 128.127,38.077 ; D2.1@136.719,35.211 ccw(c136.436,35.494) D2.1@136.837,35.494 ; D2.1@137.16,34.77 136.837,35.393 136.837,35.52 136.837,35.666 136.658,35.897 136.516,35.934 128.206,38.064 128.18,38.07 128.127,38.077
NetD3_1: D3.1 R6.1 | length 16.8
  Top Layer w0.254: R6.1@127.75,40.64 127.973,40.617 128.1,40.617 128.136,40.617 ; R6.1@127.932,40.511 cw(c128.136,40.368) 128.136,40.617 ; R6.1@127.952,40.734 ccw(c128.136,40.82) 128.136,40.617 ; D3.1@141.799,35.211 ccw(c141.516,35.494) D3.1@141.917,35.494 ; D3.1@142.24,34.77 141.917,35.393 141.917,35.52 141.917,35.656 141.759,35.878 141.631,35.923 128.241,40.593 128.207,40.605 128.136,40.617
NetD4_1: D4.1 R7.1 | length 23.4
  Top Layer w0.254: R7.1@127.75,43.18 127.973,43.157 128.1,43.157 128.145,43.157 ; R7.1@127.93,43.048 cw(c128.145,42.89) 128.145,43.157 ; R7.1@127.95,43.278 ccw(c128.145,43.374) 128.145,43.157 ; 146.516,35.095 cw(c146.392,34.515) D4.1@146.964,34.672 ; D4.1@146.574,35.083 cw(c146.471,34.595) D4.1@146.959,34.696 ; D4.1@146.596,35.093 ccw(c146.596,35.494) D4.1@146.879,35.211 ; D4.1@147.32,34.77 146.697,35.093 146.57,35.093 146.525,35.093 146.438,35.111 146.398,35.129 128.272,43.121 128.232,43.138 128.145,43.157
NetJ2_2: J2.2 R10.1 | length 13.7
  Top Layer w0.254: J2.2@48.26,41.29 48.823,41.29 48.95,41.29 49.071,41.29 49.304,41.356 49.407,41.419 58.193,46.796 58.288,46.854 58.397,47.048 ; J2.2@48.779,41.372 ccw(c49.031,41.757) 49.156,41.314 ; J2.2@48.794,41.221 cw(c48.961,41.054) 48.961,41.29 ; J2.2@48.794,41.359 ccw(c48.962,41.527) 48.962,41.29 ; R10.1@58.267,47.347 cw(c57.986,47.048) 58.397,47.048 ; R10.1@58.42,47.51 58.397,47.287 58.397,47.16 58.397,47.048 ; R10.1@58.545,47.325 ccw(c58.731,47.048) 58.397,47.048
NetJ2_3: J2.3 R11.1 | length 15.5
  Top Layer w0.254: J2.3@48.26,40.64 48.823,40.64 48.95,40.64 49.164,40.64 49.574,40.757 49.757,40.871 60.325,47.457 60.367,47.483 60.461,47.51 ; J2.3@48.794,40.571 cw(c48.961,40.404) 48.961,40.64 ; J2.3@48.794,40.709 ccw(c48.962,40.877) 48.962,40.64 ; R11.1@60.67,47.393 ccw(c60.461,47.264) 60.461,47.51 ; R11.1@60.67,47.627 cw(c60.461,47.756) 60.461,47.51 ; R11.1@60.96,47.51 60.637,47.51 60.51,47.51 60.461,47.51
NetQ1_1: Q1.1 Q3.3 R12.1 | length 9.4
  Top Layer w0.254: R12.1@53.744,63.79 ccw(c53.617,63.998) 53.86,63.998 ; R12.1@53.86,63.5 53.86,63.823 53.86,63.95 53.86,63.998 ; R12.1@53.976,63.79 cw(c54.103,63.998) 53.86,63.998 ; Q3.3@55.42,67.142 cw(c55.369,66.93) 55.587,66.93 ; Q3.3@56.151,67.21 cw(c56.345,67.072) 56.345,67.31 ; Q3.3@56.151,67.41 ccw(c56.345,67.548) 56.345,67.31 ; Q1.1@58.234,65.884 ccw(c58.145,66.141) 58.417,66.141 ; Q1.1@58.565,65.72 58.417,65.893 58.417,66.02 58.417,66.141 ; 53.86,63.998 53.886,64.091 53.911,64.132 55.525,66.788 55.555,66.838 55.587,66.952 55.587,67.01 55.587,67.137 Q3.3@55.735,67.31 56.183,67.31 56.31,67.31 56.345,67.31 ; 56.345,67.31 56.414,67.294 56.445,67.278 58.182,66.401 58.29,66.347 58.417,66.141
NetQ2_1: Q2.1 Q4.3 R13.1 | length 9.4
  Top Layer w0.254: R13.1@117.241,89.189 ccw(c117.106,89.404) 117.36,89.404 ; R13.1@117.36,88.9 117.36,89.223 117.36,89.35 117.36,89.404 ; R13.1@117.479,89.189 cw(c117.614,89.404) 117.36,89.404 ; Q4.3@118.923,92.541 cw(c118.879,92.338) 119.087,92.338 ; Q4.3@119.651,92.61 cw(c119.845,92.472) 119.845,92.71 ; Q4.3@119.651,92.81 ccw(c119.845,92.948) 119.845,92.71 ; Q2.1@121.734,91.284 ccw(c121.645,91.541) 121.917,91.541 ; Q2.1@122.065,91.12 121.917,91.293 121.917,91.42 121.917,91.541 ; 117.36,89.404 117.392,89.507 117.423,89.55 118.364,90.898 118.384,90.927 118.42,90.987 118.436,91.018 119.041,92.218 119.064,92.262 119.087,92.36 119.087,92.41 119.087,92.537 Q4.3@119.235,92.71 119.683,92.71 119.81,92.71 119.845,92.71 ; 119.845,92.71 119.914,92.694 119.945,92.678 121.682,91.801 121.79,91.747 121.917,91.541
NRD: P6.21 U3.34 | length 59.3
  Top Layer w0.2: 47.09,73.85 47.394,74.277 47.468,74.381 47.66,74.547 47.885,74.663 48.133,74.723 48.291,74.723 48.353,74.726 48.385,74.729 49.82,74.85
  Top Layer w0.254: P6.21@45.125,83.634 cw(c43.69,83.184) 45.023,82.487 cw(c46.356,81.79) P6.21@45.906,83.225 ; P6.21@45.368,83.71 cw(c44.518,83.443) 45.307,83.031 cw(c46.097,82.618) P6.21@45.83,83.468 ; P6.21@45.72,83.82 44.677,81.825 44.611,81.699 44.543,81.422 44.543,73.66 44.543,73.457 44.679,73.076 44.933,72.761 45.278,72.55 45.676,72.466 46.077,72.52 46.437,72.705 46.716,73.001 46.797,73.185 47.09,73.85 ; 49.82,74.85 53.984,76.956 54.303,77.117 54.871,77.562 55.103,77.832 62.129,86.004 62.274,86.172 62.612,86.461 62.99,86.694 63.399,86.867 63.615,86.922 67.712,87.953 67.77,87.967 67.89,87.982 69.219,87.982 69.356,87.963 69.423,87.943 69.795,87.571 70.624,87.571 70.673,87.583 70.771,87.594 70.821,87.594 77.185,87.595 77.225,87.595 81.395,87.56 U3.34@81.4,88.33 ; U3.34@81.295,88.226 cw(c81.041,87.975) 81.398,87.973 cw(c81.755,87.971) U3.34@81.504,88.225
NRESET: P2.5 P6.24 R1.1 U3.20 | length 100.9
  Top Layer w0.254: v1@74.006,83.202 ccw(c73.948,83.98) 74.539,83.471 ccw(c75.13,82.962) v1@74.352,82.904 ; v1(74.03,82.88) 74.819,83.797 74.913,83.905 75.163,84.044 75.305,84.065 76.972,84.317 77.04,84.327 77.172,84.334 77.24,84.332 79.535,84.246 79.699,84.239 79.996,84.103 80.218,83.863 80.332,83.557 80.325,83.394 80.323,83.336 80.325,83.221 80.329,83.166 80.41,82.066 80.415,81.999 80.416,81.861 80.411,81.793 80.357,80.966 80.339,80.691 80.491,80.158 80.652,79.932 81.976,78.083 82.054,77.973 82.285,77.83 82.42,77.808 83.207,77.683 83.218,77.682 83.239,77.68 83.25,77.68 83.377,77.68 U3.20@83.85,77.68 84.278,77.677 84.921,77.677 90.81,69.569 90.88,69.473 91.066,69.324 91.176,69.277 116.187,58.643 116.305,58.593 116.447,58.378 116.447,58.25 116.447,57.55 116.447,57.539 116.446,57.519 116.445,57.509 116.368,56.716 116.356,56.582 116.155,56.4 ; 82.888,77.734 ccw(c82.946,78.098) U3.20@83.163,77.8 ; 82.905,77.731 cw(c82.85,77.39) U3.20@83.13,77.593 ; U3.20@84.555,77.575 cw(c84.801,77.329) 84.801,77.677 ; U3.20@84.555,77.785 ccw(c84.814,78.044) 84.814,77.677 ; P2.5@109.22,53.34 111.215,52.297 111.391,52.205 111.783,52.147 112.172,52.22 112.516,52.416 112.647,52.566 115.442,55.769 115.493,55.828 115.547,55.972 115.547,56.05 115.547,56.177 R1.1@115.57,56.4 115.893,56.4 116.02,56.4 116.155,56.4 ; P2.5@109.33,52.988 cw(c109.597,52.138) 110.009,52.927 cw(c110.422,53.717) P2.5@109.572,53.45 ; P2.5@109.406,52.745 cw(c109.856,51.31) 110.553,52.643 cw(c111.25,53.976) P2.5@109.815,53.526 ; R1.1@115.412,56.243 cw(c115.085,55.917) 115.547,55.916 ; R1.1@115.839,56.255 cw(c116.155,55.984) 116.155,56.4 ; R1.1@115.839,56.545 ccw(c116.155,56.816) 116.155,56.4
  Bottom Layer w0.254: P6.24@48.26,86.36 63.338,85.74 63.347,85.74 70.74,85.322 70.768,85.32 70.825,85.319 70.853,85.32 71.306,85.33 71.491,85.334 71.834,85.191 71.961,85.057 v1(74.03,82.88) ; v1@73.707,82.888 ccw(c72.928,82.908) 73.493,83.445 ccw(c74.058,83.982) v1@74.038,83.203
NWR: D5.5 P6.22 U3.33 | length 64.8
  Top Layer w0.254: v1(71.325,84.453) 72.197,85.155 72.326,85.26 72.607,85.437 72.758,85.511 73.694,85.963 73.711,85.971 73.745,85.99 73.762,86 73.901,86.085 74.193,86.225 74.345,86.279 75.786,86.797 76.13,86.92 76.851,87.043 77.22,87.041 81.391,87.006 81.482,87.005 81.653,87.061 81.798,87.169 81.902,87.318 81.927,87.404 82.073,87.9 82.086,87.943 82.186,88.243 82.193,88.264 82.2,88.308 82.2,88.33 82.2,88.457 U3.33@82.2,88.93 82.2,89.403 82.2,89.53 82.2,89.575 82.228,89.66 82.255,89.696 D5.5@95.25,106.934 ; v1@71.36,84.774 ccw(c71.443,85.549) 71.932,84.942 ccw(c72.422,84.335) v1@71.646,84.418 ; U3.33@82.068,88.262 cw(c81.722,88.084) 82.092,87.961 ; 82.111,88.019 cw(c82.405,87.921) U3.33@82.266,88.198 ; U3.33@82.347,89.551 cw(c82.888,89.627) 82.451,89.955 ; D5.5@94.584,106.84 cw(c92.975,106.615) 94.272,105.637 cw(c95.569,104.659) D5.5@95.344,106.268 ; D5.5@94.835,106.876 cw(c93.833,106.735) 94.641,106.126 cw(c95.449,105.517) D5.5@95.308,106.519
  Bottom Layer w0.254: P6.22@48.26,83.82 v1(71.325,84.453)
RESET_CT: P1.7 P3.5 U3.40 | length 73.1
  Top Layer w0.254: P1.7@63.5,118.745 65.495,119.788 65.621,119.854 65.898,119.922 66.04,119.922 71.87,119.922 71.896,119.921 P3.5@91.44,118.745 ; P1.7@63.61,119.097 ccw(c63.877,119.947) 64.289,119.158 ccw(c64.702,118.368) P1.7@63.852,118.635 ; P1.7@63.686,119.34 ccw(c64.136,120.775) 64.833,119.442 ccw(c65.53,118.109) P1.7@64.095,118.559 ; U3.40@76.548,89.669 ccw(c76.452,89.924) 76.701,89.811 ; U3.40@76.6,88.93 76.6,89.403 76.6,89.53 76.6,89.56 76.613,89.617 76.625,89.644 76.896,90.24 76.926,90.307 77.021,90.422 77.082,90.464 v1(78.349,91.354) ; U3.40@76.739,89.582 cw(c77.152,89.737) 76.75,89.92 ; v1@78.031,91.41 cw(c77.263,91.544) 77.711,90.906 cw(c78.159,90.268) v1@78.293,91.036 ; P3.5@90.974,118.332 ccw(c89.848,117.334) 89.939,118.835 ccw(c90.029,120.337) P3.5@91.027,119.211 ; P3.5@91.164,118.5 ccw(c90.497,117.909) 90.551,118.799 ccw(c90.604,119.688) P3.5@91.195,119.021
  Bottom Layer w0.254: v1@78.236,91.657 ccw(c77.964,92.387) 78.673,92.063 ccw(c79.382,91.739) v1@78.652,91.467 ; v1(78.349,91.354) 78.825,92.395 78.853,92.458 78.921,92.574 78.96,92.629 88.63,106.223 88.713,106.34 88.822,106.609 88.844,106.753 90.276,116.378 90.29,116.475 90.351,116.663 90.397,116.75 P3.5@91.44,118.745
SCK: P1.13 P2.3 P3.3 U3.11 U4.6 U5.6 U6.6 U7.6 | length 182.8
  Top Layer w0.254: P1.13@55.88,118.745 57.875,119.788 57.981,119.844 58.213,119.91 58.334,119.919 65.914,120.471 65.946,120.474 66.01,120.476 66.04,120.476 71.87,120.476 71.898,120.476 91.473,119.922 91.607,119.918 91.867,119.85 91.985,119.788 P3.3@93.98,118.745 ; P1.13@55.99,119.097 ccw(c56.257,119.947) 56.669,119.158 ccw(c57.082,118.368) P1.13@56.232,118.635 ; P1.13@56.066,119.34 ccw(c56.516,120.775) 57.213,119.442 ccw(c57.91,118.109) P1.13@56.475,118.559 ; 69.755,55.164 cw(c69.844,54.734) U7.6@70.085,55.1 ; 69.784,55.17 ccw(c69.704,55.558) U7.6@70.035,55.34 ; U7.6@71.88,55.104 cw(c72.129,54.75) 72.203,55.176 ; U7.6@71.921,55.345 ccw(c72.251,55.576) 72.182,55.18 ; v1@77.044,82.612 cw(c76.701,81.911) 77.438,82.164 cw(c78.176,82.417) v1@77.476,82.76 ; v1(77.186,82.902) 77.619,81.637 77.625,81.619 77.64,81.582 77.648,81.563 78.456,79.76 78.528,79.599 78.64,79.256 78.677,79.083 79.185,76.707 79.235,76.472 79.224,75.989 79.101,75.521 78.873,75.095 78.713,74.914 78.269,74.412 78.236,74.374 78.2,74.281 78.2,74.23 78.2,74.103 U3.11@78.2,73.63 78.2,73.157 78.2,73.03 78.2,73.011 78.195,72.974 78.19,72.956 74.894,61.181 74.851,61.026 74.697,60.742 74.483,60.5 74.22,60.311 74.072,60.248 72.593,59.625 72.495,59.584 72.285,59.546 72.177,59.551 71.903,59.563 71.78,59.566 71.766,59.565 71.429,59.562 71.409,59.562 71.371,59.564 71.351,59.565 71.338,59.566 71.32,59.567 71.211,59.574 71.172,59.576 71.091,59.577 71.052,59.575 70.863,59.566 70.807,59.565 70.75,59.566 70.701,59.566 70.439,59.561 70.38,59.561 70.242,59.567 70.198,59.569 70.112,59.568 70.068,59.564 64.599,59.15 64.494,59.142 64.306,59.051 64.163,58.898 64.087,58.702 64.087,58.598 64.087,57.195 64.087,57.172 64.09,57.129 64.094,57.108 64.492,54.605 65.241,54.61 66.98,54.61 67.027,54.61 67.123,54.62 67.169,54.629 70.119,55.239 70.134,55.242 70.165,55.245 70.18,55.245 70.307,55.245 U7.6@70.98,55.245 71.653,55.245 71.78,55.245 71.793,55.245 71.819,55.243 71.831,55.241 75.38,54.624 75.42,54.617 75.5,54.61 75.54,54.61 77.279,54.61 78.224,54.605 80.251,55.232 80.273,55.238 80.317,55.245 80.34,55.245 80.467,55.245 U6.6@81.14,55.245 81.813,55.245 81.94,55.245 81.967,55.245 82.021,55.255 82.047,55.265 83.777,55.928 83.879,55.967 84.096,55.993 84.204,55.979 84.956,55.881 88.32,55.881 90.414,55.257 90.435,55.251 90.478,55.245 90.5,55.245 90.627,55.245 U5.6@91.3,55.245 91.973,55.245 92.1,55.245 92.119,55.245 92.156,55.25 92.174,55.254 94.641,55.886 95.721,55.88 95.999,55.88 98.324,55.886 100.579,55.256 100.599,55.251 100.639,55.245 100.66,55.245 100.787,55.245 U4.6@101.46,55.245 102.133,55.245 102.26,55.245 102.267,55.245 102.28,55.246 102.287,55.246 P2.3@109.22,55.88 ; U3.11@78.071,72.957 cw(c77.729,72.765) 78.107,72.66 ; 78.12,72.707 cw(c78.431,72.62) U3.11@78.273,72.901 ; U3.11@78.348,74.239 cw(c78.94,74.275) 78.496,74.668 ; 79.906,55.125 cw(c80.043,54.682) U6.6@80.259,55.092 ; 79.968,55.144 ccw(c79.858,55.499) U6.6@80.187,55.326 ; U6.6@82.01,55.403 ccw(c82.208,55.846) 82.382,55.393 ; U6.6@82.098,55.175 cw(c82.418,55.032) 82.292,55.359 ; 90.067,55.361 ccw(c90.199,55.802) U5.6@90.418,55.397 ; 90.125,55.344 cw(c90.018,54.984) U5.6@90.348,55.163 ; U5.6@92.188,55.394 ccw(c92.417,55.781) 92.529,55.345 ; U5.6@92.249,55.157 cw(c92.581,54.96) 92.485,55.334 ; P3.3@93.385,118.559 ccw(c91.95,118.109) 92.647,119.442 ccw(c93.344,120.775) P3.3@93.794,119.34 ; P3.3@93.628,118.635 ccw(c92.778,118.368) 93.191,119.158 ccw(c93.603,119.947) P3.3@93.87,119.097 ; 100.229,55.354 ccw(c100.352,55.792) U4.6@100.575,55.396 ; 100.28,55.34 cw(c100.178,54.974) U4.6@100.509,55.16 ; U4.6@102.371,55.378 ccw(c102.641,55.702) 102.679,55.282 ; U4.6@102.393,55.134 cw(c102.711,54.87) 102.673,55.281 ; P2.3@108.741,56.279 cw(c107.585,57.241) 107.722,55.743 cw(c107.859,54.245) P2.3@108.821,55.401 ; P2.3@108.936,56.116 cw(c108.252,56.686) 108.333,55.799 cw(c108.414,54.912) P2.3@108.984,55.596
  Bottom Layer w0.254: v1@77.107,83.215 ccw(c76.918,83.972) 77.587,83.57 ccw(c78.256,83.169) v1@77.499,82.98 ; v1(77.186,82.902) 91.222,106.303 91.284,106.406 91.366,106.635 91.384,106.753 92.816,116.378 92.83,116.475 92.891,116.663 92.937,116.75 P3.3@93.98,118.745